# EAGLE board Hydro Model Wave Motion Lighting System - Electrical design files (EAGLE 9.7.0)

Size 495.49 x 235.64 mm. Coordinates in mm from the lower left corner, seen from the top.
Outline: 0,0 495.49,0 495.49,235.64 0,235.64 0,0
Copper layers (1*16): Top 0.035mm / dielectric 1.5mm / Bottom 0.035mm
Design rules "default": minimum track width 6mil, minimum drill 0.35mm, track to track 6mil, track to pad 6mil, pad to pad 6mil, via to via 6mil, smd to smd 6mil, copper to edge 40mil, drill to drill 6mil, minimum pad ring 10mil, minimum via ring 8mil, stop-mask expansion 4mil, vias tented up to drill 0mil, thermal gap 10mil

## Footprints (pad centres in the part's own frame; a part is rotated, then mirrored left to right if it is on the bottom)
BATTERY-GENERIC = drill 1.118 pad 3.15 octagon: + 2.54,0; - -2.54,0
LEDRD254W60D565H860B = drill 0.981 pad 1.581: 1 -1.27,0; 2 1.27,0
LU-5-R = drill 0.8: 1 -6.35,-3.81; 5 3.81,-3.81; 6 6.35,-3.81; 7 6.35,3.81; 8 3.81,3.81; 12 -6.35,3.81
RESAD1016W63L850D250B = drill 0.83 pad 1.43: 1 -5.08,0; 2 5.08,0
ARDUINO-UNO-R3-SHIELD = drill 1.016 pad 1.88: 3.3V 24.13,-2.54; 5V 24.13,0; A0 24.13,12.7; A1 24.13,15.24; A2 24.13,17.78; A3 24.13,20.32; A4 24.13,22.86; A5 24.13,25.4; AREF -24.13,-13.97; D2 -24.13,20.32; D3 -24.13,17.78; D4 -24.13,15.24; D5 -24.13,12.7; D6 -24.13,10.16; D7 -24.13,7.62; D8 -24.13,3.81; D9 -24.13,1.27; D10 -24.13,-1.27; D11 -24.13,-3.81; D12 -24.13,-6.35; D13 -24.13,-8.89; GND@0 24.13,2.54; GND@1 24.13,5.08; GND@2 -24.13,-11.43; IOREF 24.13,-7.62; NC 24.13,-10.16; RES 24.13,-5.08; RX -24.13,25.4; SCL -24.13,-19.05; SDA -24.13,-16.51; TX -24.13,22.86; VIN 24.13,7.62

## Placement (x,y rotation side)
BAT1  1.5V  [BATTERY-GENERIC]  289.03,31.15 270 top
BAT2  9V  [BATTERY-GENERIC]  289.03,8.26 270 top
BAT3  1.5V  [BATTERY-GENERIC]  289.04,52.22 270 top
BAT4  9V  [BATTERY-GENERIC]  37.37,67.57 180 top
BAT5  1.5V  [BATTERY-GENERIC]  60.26,67.57 180 top
BAT6  1.5V  [BATTERY-GENERIC]  81.34,67.55 180 top
D1  RED  [LEDRD254W60D565H860B]  208.55,177.28 180 top
D2  RED  [LEDRD254W60D565H860B]  211.09,174.74 180 top
D3  RED  [LEDRD254W60D565H860B]  213.63,172.2 180 top
D4  RED  [LEDRD254W60D565H860B]  307.61,169.66 180 top
D5  RED  [LEDRD254W60D565H860B]  292.37,169.66 180 top
D6  RED  [LEDRD254W60D565H860B]  223.79,177.28 180 top
D7  RED  [LEDRD254W60D565H860B]  226.33,174.74 180 top
D8  RED  [LEDRD254W60D565H860B]  228.87,172.2 180 top
D9  RED  [LEDRD254W60D565H860B]  239.03,177.28 180 top
D10  RED  [LEDRD254W60D565H860B]  241.57,174.74 180 top
D11  RED  [LEDRD254W60D565H860B]  244.11,172.2 180 top
D12  RED  [LEDRD254W60D565H860B]  254.27,177.28 180 top
D13  RED  [LEDRD254W60D565H860B]  256.81,174.74 180 top
D14  RED  [LEDRD254W60D565H860B]  259.35,172.2 180 top
D15  RED  [LEDRD254W60D565H860B]  277.13,169.66 180 top
D16  RED  [LEDRD254W60D565H860B]  261.89,169.66 180 top
D17  RED  [LEDRD254W60D565H860B]  246.65,169.66 180 top
D18  RED  [LEDRD254W60D565H860B]  231.41,169.66 180 top
D19  RED  [LEDRD254W60D565H860B]  269.51,177.28 180 top
D20  RED  [LEDRD254W60D565H860B]  272.05,174.74 180 top
D21  RED  [LEDRD254W60D565H860B]  274.59,172.2 180 top
D22  RED  [LEDRD254W60D565H860B]  284.75,177.28 180 top
D23  RED  [LEDRD254W60D565H860B]  287.29,174.74 180 top
D24  RED  [LEDRD254W60D565H860B]  289.83,172.2 180 top
D25  RED  [LEDRD254W60D565H860B]  198.39,172.2 180 top
D26  RED  [LEDRD254W60D565H860B]  195.85,174.74 180 top
D27  RED  [LEDRD254W60D565H860B]  299.99,177.28 180 top
D28  RED  [LEDRD254W60D565H860B]  302.53,174.74 180 top
D29  RED  [LEDRD254W60D565H860B]  305.07,172.2 180 top
D30  RED  [LEDRD254W60D565H860B]  216.17,169.66 180 top
D31  RED  [LEDRD254W60D565H860B]  200.93,169.66 180 top
D32  RED  [LEDRD254W60D565H860B]  193.31,177.28 180 top
D33  RED  [LEDRD254W60D565H860B]  390.37,177.06 180 top
D34  RED  [LEDRD254W60D565H860B]  392.91,174.52 180 top
D35  RED  [LEDRD254W60D565H860B]  395.45,171.98 180 top
D36  RED  [LEDRD254W60D565H860B]  375.13,177.06 180 top
D37  RED  [LEDRD254W60D565H860B]  377.67,174.52 180 top
D38  RED  [LEDRD254W60D565H860B]  380.21,171.98 180 top
D39  RED  [LEDRD254W60D565H860B]  405.61,177.06 180 top
D40  RED  [LEDRD254W60D565H860B]  408.15,174.52 180 top
D41  RED  [LEDRD254W60D565H860B]  410.69,171.98 180 top
D42  RED  [LEDRD254W60D565H860B]  420.85,177.06 180 top
D43  RED  [LEDRD254W60D565H860B]  423.39,174.52 180 top
D44  RED  [LEDRD254W60D565H860B]  425.93,171.98 180 top
D45  RED  [LEDRD254W60D565H860B]  436.09,177.06 180 top
D46  RED  [LEDRD254W60D565H860B]  438.63,174.52 180 top
D47  RED  [LEDRD254W60D565H860B]  441.17,171.98 180 top
D48  RED  [LEDRD254W60D565H860B]  451.33,177.06 180 top
D49  RED  [LEDRD254W60D565H860B]  453.87,174.52 180 top
D50  RED  [LEDRD254W60D565H860B]  456.41,171.98 180 top
D51  RED  [LEDRD254W60D565H860B]  466.57,177.06 180 top
D52  RED  [LEDRD254W60D565H860B]  469.11,174.52 180 top
D53  RED  [LEDRD254W60D565H860B]  471.65,171.98 180 top
D54  RED  [LEDRD254W60D565H860B]  481.81,177.06 180 top
D55  RED  [LEDRD254W60D565H860B]  484.35,174.52 180 top
D56  RED  [LEDRD254W60D565H860B]  486.89,171.98 180 top
D57  RED  [LEDRD254W60D565H860B]  7.6,201.27 180 top
D58  RED  [LEDRD254W60D565H860B]  10.14,198.73 180 top
D59  RED  [LEDRD254W60D565H860B]  12.68,196.19 180 top
D60  RED  [LEDRD254W60D565H860B]  15.22,193.65 180 top
D61  RED  [LEDRD254W60D565H860B]  38.08,201.27 180 top
D62  RED  [LEDRD254W60D565H860B]  40.62,198.73 180 top
D63  RED  [LEDRD254W60D565H860B]  43.16,196.19 180 top
D64  RED  [LEDRD254W60D565H860B]  45.7,193.65 180 top
D65  RED  [LEDRD254W60D565H860B]  68.56,201.27 180 top
D66  RED  [LEDRD254W60D565H860B]  71.1,198.73 180 top
D67  RED  [LEDRD254W60D565H860B]  73.64,196.19 180 top
D68  RED  [LEDRD254W60D565H860B]  76.18,193.65 180 top
D69  RED  [LEDRD254W60D565H860B]  101.58,201.27 180 top
D70  RED  [LEDRD254W60D565H860B]  104.12,198.73 180 top
D71  RED  [LEDRD254W60D565H860B]  106.66,196.19 180 top
D72  RED  [LEDRD254W60D565H860B]  109.2,193.65 180 top
D100  RED  [LEDRD254W60D565H860B]  489.43,169.44 180 top
D101  RED  [LEDRD254W60D565H860B]  474.19,169.44 180 top
D111  RED  [LEDRD254W60D565H860B]  458.95,169.44 180 top
D112  RED  [LEDRD254W60D565H860B]  443.71,169.44 180 top
D113  RED  [LEDRD254W60D565H860B]  428.47,169.44 180 top
D114  RED  [LEDRD254W60D565H860B]  413.23,169.44 180 top
D126  RED  [LEDRD254W60D565H860B]  397.99,169.44 180 top
D127  RED  [LEDRD254W60D565H860B]  382.75,169.44 180 top
K1  RELAY-SPDT_LU-5-R  [LU-5-R]  265.24,102.56 180 top
K2  RELAY-SPDT_LU-5-R  [LU-5-R]  295.72,102.56 180 top
K3  RELAY-SPDT_LU-5-R  [LU-5-R]  328.74,102.56 180 top
K4  RELAY-SPDT_LU-5-R  [LU-5-R]  359.22,102.56 180 top
K5  RELAY-SPDT_LU-5-R  [LU-5-R]  106.01,137.01 180 top
K6  RELAY-SPDT_LU-5-R  [LU-5-R]  75.53,137.01 180 top
K7  RELAY-SPDT_LU-5-R  [LU-5-R]  42.51,137.01 180 top
K8  RELAY-SPDT_LU-5-R  [LU-5-R]  12.03,137.01 180 top
R1  230  [RESAD1016W63L850D250B]  192.04,202.68 90 top
R2  230  [RESAD1016W63L850D250B]  207.28,202.68 90 top
R3  230  [RESAD1016W63L850D250B]  222.52,202.68 90 top
R4  230  [RESAD1016W63L850D250B]  237.76,202.68 90 top
R5  230  [RESAD1016W63L850D250B]  253,202.68 90 top
R6  230  [RESAD1016W63L850D250B]  268.24,202.68 90 top
R7  230  [RESAD1016W63L850D250B]  283.48,202.68 90 top
R8  230  [RESAD1016W63L850D250B]  298.72,202.68 90 top
R9  230  [RESAD1016W63L850D250B]  373.86,202.46 90 top
R10  230  [RESAD1016W63L850D250B]  389.1,202.46 90 top
R11  230  [RESAD1016W63L850D250B]  404.34,202.46 90 top
R12  230  [RESAD1016W63L850D250B]  419.58,202.46 90 top
R13  230  [RESAD1016W63L850D250B]  434.82,202.46 90 top
R14  230  [RESAD1016W63L850D250B]  450.06,202.46 90 top
R15  230  [RESAD1016W63L850D250B]  465.3,202.46 90 top
R16  230  [RESAD1016W63L850D250B]  480.54,202.46 90 top
R17  230  [RESAD1016W63L850D250B]  6.33,226.67 90 top
R18  230  [RESAD1016W63L850D250B]  36.81,226.67 90 top
R19  230  [RESAD1016W63L850D250B]  67.29,226.67 90 top
R20  230  [RESAD1016W63L850D250B]  100.31,226.67 90 top
U1  ARDUINO-UNO-R3-SHIELD  [ARDUINO-UNO-R3-SHIELD]  197.25,39.99 270 top

## Library data of the parts
BAT1-BAT6 K1-K8 R1-R20 U1 = Tinkercad
D1-D72 D100 D101 D111-D114 D126 D127 = Tinkercad; CATEGORY: Opto-Electronic; SUB-CATEGORY: LED; VALUE: LED_RED

## Nets
BAT1+: BAT1.+ BAT2.-
BAT2+: BAT2.+ K1.1 K1.12 K2.1 K2.12 K3.1 K3.12 K4.1 K4.12
BAT3+: BAT1.- BAT3.+
BAT3-: BAT3.- R1.2 R2.2 R3.2 R4.2 R5.2 R6.2 R7.2 R8.2 R9.2 R10.2 R11.2 R12.2 R13.2 R14.2 R15.2 R16.2
BAT4+: BAT4.+ K5.1 K5.12 K6.1 K6.12 K7.1 K7.12 K8.1 K8.12
BAT5+: BAT4.- BAT5.+
BAT6+: BAT5.- BAT6.+
BAT6-: BAT6.- R17.2 R18.2 R20.2
D1_A: D1.1 D2.2
D1_C: D1.2 R2.1
D2_A: D2.1 D3.2
D4_C: D4.2 D29.1
D5_C: D5.2 D24.1
D6_A: D6.1 D7.2
D6_C: D6.2 R3.1
D7_A: D7.1 D8.2
D9_A: D9.1 D10.2
D9_C: D9.2 R4.1
D10_A: D10.1 D11.2
D12_A: D12.1 D13.2
D12_C: D12.2 R5.1
D13_A: D13.1 D14.2
D15_C: D15.2 D21.1
D16_C: D14.1 D16.2
D17_A: D4.1 D17.1 D100.1 D113.1 K4.6
D17_C: D11.1 D17.2
D18_C: D8.1 D18.2
D19_A: D19.1 D20.2
D19_C: D19.2 R6.1
D20_A: D20.1 D21.2
D22_A: D22.1 D23.2
D22_C: D22.2 R7.1
D23_A: D23.1 D24.2
D25_C: D25.2 D26.1
D26_C: D26.2 D32.1
D27_A: D27.1 D28.2
D27_C: D27.2 R8.1
D28_A: D28.1 D29.2
D30_C: D3.1 D30.2
D31_C: D25.1 D31.2
D32_C: D32.2 R1.1
D33_A: D33.1 D34.2
D33_C: D33.2 R10.1
D34_A: D34.1 D35.2
D36_A: D36.1 D37.2
D36_C: D36.2 R9.1
D37_A: D37.1 D38.2
D39_A: D39.1 D40.2
D39_C: D39.2 R11.1
D40_A: D40.1 D41.2
D42_A: D42.1 D43.2
D42_C: D42.2 R12.1
D43_A: D43.1 D44.2
D45_A: D45.1 D46.2
D45_C: D45.2 R13.1
D46_A: D46.1 D47.2
D48_A: D48.1 D49.2
D48_C: D48.2 R14.1
D49_A: D49.1 D50.2
D51_A: D51.1 D52.2
D51_C: D51.2 R15.1
D52_A: D52.1 D53.2
D54_A: D54.1 D55.2
D54_C: D54.2 R16.1
D55_A: D55.1 D56.2
D57_A: D57.1 D58.2
D57_C: D57.2 R17.1
D58_A: D58.1 D59.2
D59_A: D59.1 D60.2
D60_A: D60.1 K8.6
D61_A: D61.1 D62.2
D61_C: D61.2 R18.1
D62_A: D62.1 D63.2
D63_A: D63.1 D64.2
D64_A: D64.1 K7.6
D65_A: D65.1 D66.2
D65_C: D65.2 R19.1
D66_A: D66.1 D67.2
D67_A: D67.1 D68.2
D68_A: D68.1 K6.6
D69_A: D69.1 D70.2
D69_C: D69.2 R20.1
D70_A: D70.1 D71.2
D71_A: D71.1 D72.2
D72_A: D72.1 K5.6
D100_C: D56.1 D100.2
D101_C: D53.1 D101.2
D111_A: D15.1 D30.1 D111.1 D126.1 K2.6
D111_C: D50.1 D111.2
D112_A: D16.1 D31.1 D112.1 D127.1 K1.6
D112_C: D47.1 D112.2
D113_C: D44.1 D113.2
D114_A: D5.1 D18.1 D101.1 D114.1 K3.6
D114_C: D41.1 D114.2
D126_C: D35.1 D126.2
D127_C: D38.1 D127.2
U1_D4: K8.5 U1.D4
U1_D5: K7.5 U1.D5
U1_D6: K6.5 U1.D6
U1_D7: K5.5 U1.D7
U1_D10: K1.5 U1.D10
U1_D11: K2.5 U1.D11
U1_D12: K3.5 U1.D12
U1_D13: K4.5 U1.D13
U1_GND: K1.8 K2.8 K3.8 K4.8 K5.8 K6.8 K7.8 K8.8 U1.GND@0 U1.GND@1 U1.GND@2

## Tracks (layer width: path | path; a pad name or v marks a point on that pad's centre or on a via)
BAT1+  (1 unrouted)
BAT2+  (8 unrouted)
BAT3+  (1 unrouted)
BAT3-  (16 unrouted)
BAT4+  (8 unrouted)
BAT5+  (1 unrouted)
BAT6+  (1 unrouted)
BAT6-  (3 unrouted)
D1_A  (1 unrouted)
D1_C  (1 unrouted)
D2_A  (1 unrouted)
D4_C  (1 unrouted)
D5_C  (1 unrouted)
D6_A  (1 unrouted)
D6_C  (1 unrouted)
D7_A  (1 unrouted)
D9_A  (1 unrouted)
D9_C  (1 unrouted)
D10_A  (1 unrouted)
D12_A  (1 unrouted)
D12_C  (1 unrouted)
D13_A  (1 unrouted)
D15_C  (1 unrouted)
D16_C  (1 unrouted)
D17_A  (4 unrouted)
D17_C  (1 unrouted)
D18_C  (1 unrouted)
D19_A  (1 unrouted)
D19_C  (1 unrouted)
D20_A  (1 unrouted)
D22_A  (1 unrouted)
D22_C  (1 unrouted)
D23_A  (1 unrouted)
D25_C  (1 unrouted)
D26_C  (1 unrouted)
D27_A  (1 unrouted)
D27_C  (1 unrouted)
D28_A  (1 unrouted)
D30_C  (1 unrouted)
D31_C  (1 unrouted)
D32_C  (1 unrouted)
D33_A  (1 unrouted)
D33_C  (1 unrouted)
D34_A  (1 unrouted)
D36_A  (1 unrouted)
D36_C  (1 unrouted)
D37_A  (1 unrouted)
D39_A  (1 unrouted)
D39_C  (1 unrouted)
D40_A  (1 unrouted)
D42_A  (1 unrouted)
D42_C  (1 unrouted)
D43_A  (1 unrouted)
D45_A  (1 unrouted)
D45_C  (1 unrouted)
D46_A  (1 unrouted)
D48_A  (1 unrouted)
D48_C  (1 unrouted)
D49_A  (1 unrouted)
D51_A  (1 unrouted)
D51_C  (1 unrouted)
D52_A  (1 unrouted)
D54_A  (1 unrouted)
D54_C  (1 unrouted)
D55_A  (1 unrouted)
D57_A  (1 unrouted)
D57_C  (1 unrouted)
D58_A  (1 unrouted)
D59_A  (1 unrouted)
D60_A  (1 unrouted)
D61_A  (1 unrouted)
D61_C  (1 unrouted)
D62_A  (1 unrouted)
D63_A  (1 unrouted)
D64_A  (1 unrouted)
D65_A  (1 unrouted)
D65_C  (1 unrouted)
D66_A  (1 unrouted)
D67_A  (1 unrouted)
D68_A  (1 unrouted)
D69_A  (1 unrouted)
D69_C  (1 unrouted)
D70_A  (1 unrouted)
D71_A  (1 unrouted)
D72_A  (1 unrouted)
D100_C  (1 unrouted)
D101_C  (1 unrouted)
D111_A  (4 unrouted)
D111_C  (1 unrouted)
D112_A  (4 unrouted)
D112_C  (1 unrouted)
D113_C  (1 unrouted)
D114_A  (4 unrouted)
D114_C  (1 unrouted)
D126_C  (1 unrouted)
D127_C  (1 unrouted)
U1_D4  (1 unrouted)
U1_D5  (1 unrouted)
U1_D6  (1 unrouted)
U1_D7  (1 unrouted)
U1_D10  (1 unrouted)
U1_D11  (1 unrouted)
U1_D12  (1 unrouted)
U1_D13  (1 unrouted)
U1_GND  (10 unrouted)